# EAGLE board power_supp_basic (EAGLE 7.2.0)
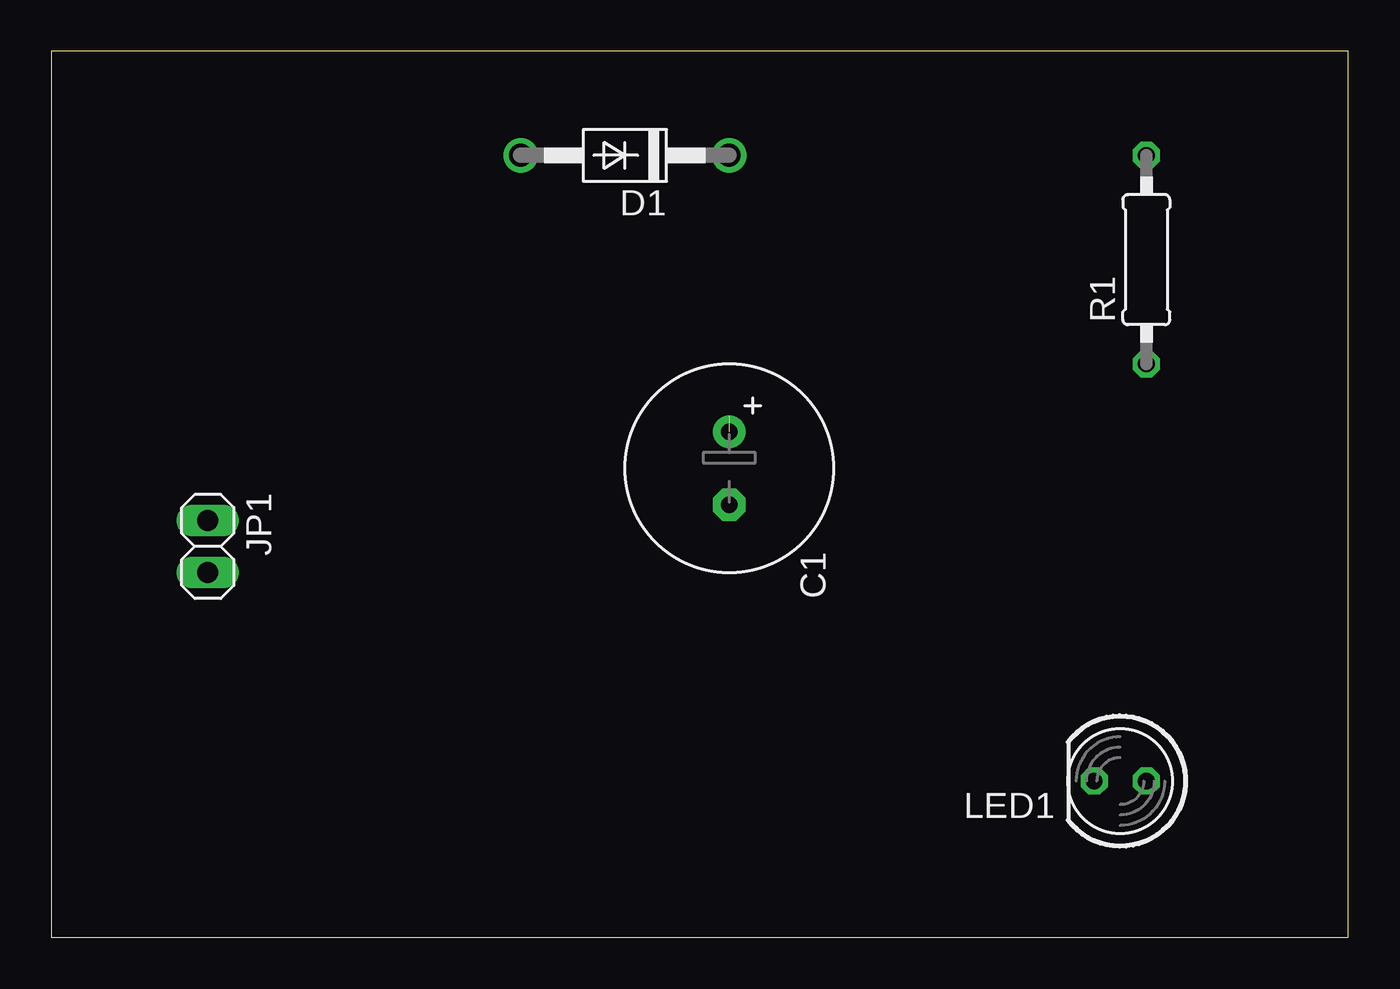
[diagram p0: board, top side]
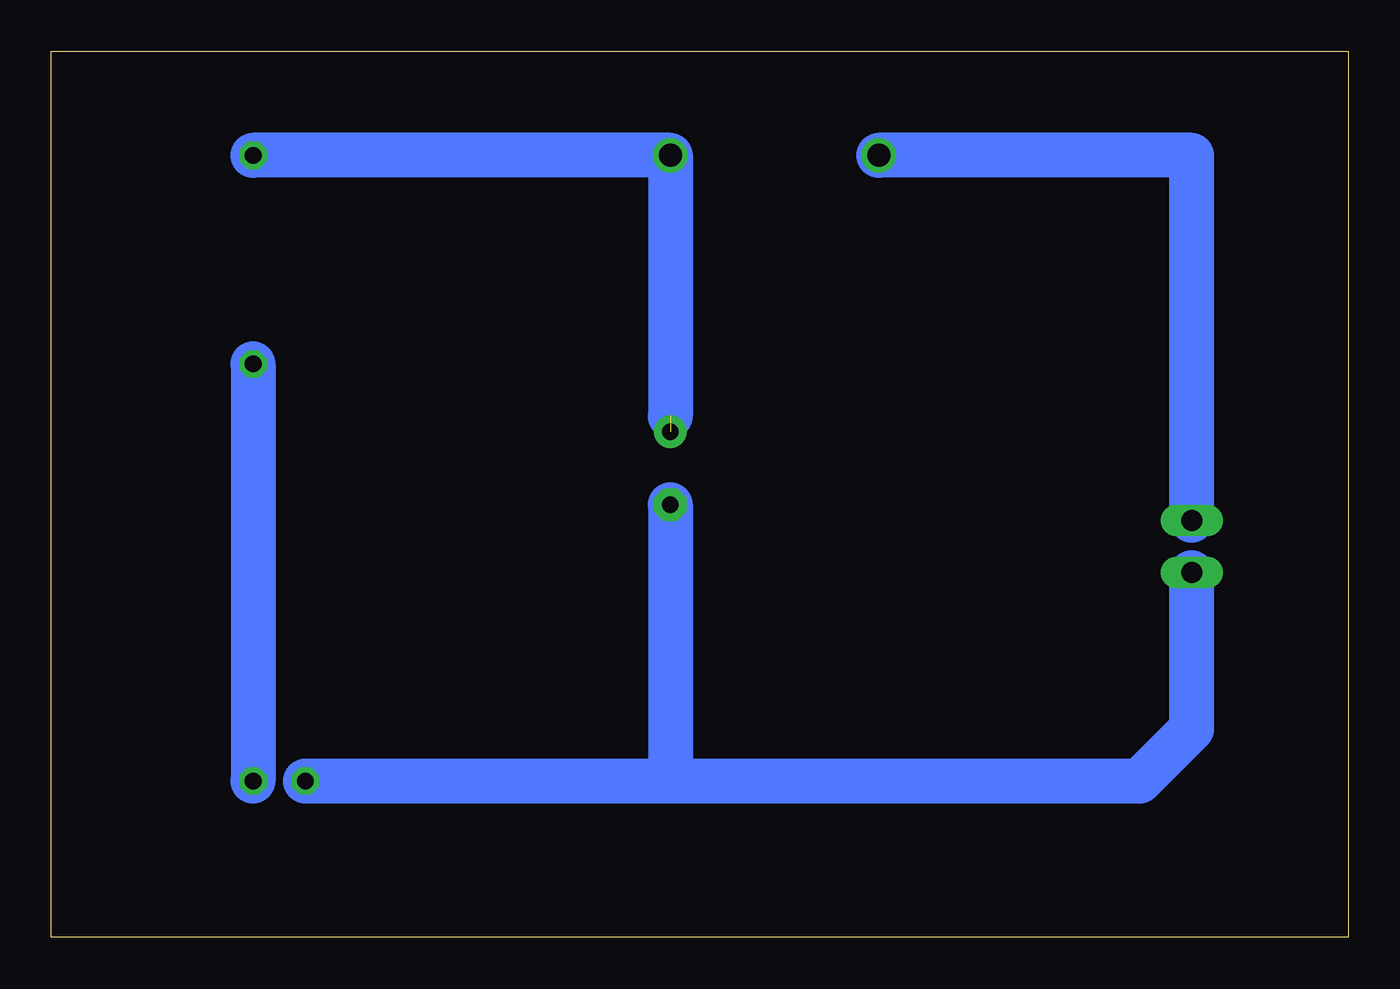
[diagram p1: board, bottom side, seen from below]

Size 63.17 x 43.17 mm. Coordinates in mm from the lower left corner, seen from the top.
Outline: 0,0 63.17,0 63.17,43.17 0,43.17 0,0
Copper layers (1*16): Top 0.035mm / dielectric 1.5mm / Bottom 0.035mm
Design rules "default": minimum track width 10mil, minimum drill 24mil, track to track 8mil, track to pad 8mil, pad to pad 8mil, via to via 8mil, smd to smd 8mil, copper to edge 40mil, drill to drill 8mil, minimum pad ring 10mil, minimum via ring 8mil, stop-mask expansion 4mil, vias tented up to drill 0mil, thermal gap 10mil

## Footprints (pad centres in the part's own frame; a part is rotated, then mirrored left to right if it is on the bottom)
E3,5-10 = drill 0.813 pad 1.6: + -1.778,0 | drill 0.813 pad 1.6 octagon: - 1.778,0
DO41-10 = drill 1.118: A 5.08,0; C -5.08,0
1X02 = drill 1.016 long: 1 -1.27,0; 2 1.27,0
LED5MM = drill 0.813 octagon: A -1.27,0; K 1.27,0
0207/10 = drill 0.813 octagon: 1 -5.08,0; 2 5.08,0

## Placement (x,y rotation side)
C1  [E3,5-10]  33.02,22.86 270 top
D1  1N4004  [DO41-10]  27.94,38.1 180 top
JP1  [1X02]  7.62,19.05 270 top
LED1  [LED5MM]  52.07,7.62 180 top
R1  [0207/10]  53.34,33.02 90 top

## Library data of the parts
C1 R1 = rcl
D1 = diode
JP1 = pinhead
LED1 = led

## Nets
N$1: D1.A JP1.1
N$2: C1.+ D1.C R1.2
N$3: LED1.A R1.1
N$5: C1.- JP1.2 LED1.K

## Tracks (layer width: path | path; a pad name or v marks a point on that pad's centre or on a via)
N$1
  Bottom 2.184: JP1.1 7.62,38.1 D1.A
N$2  (1 unrouted)
  Bottom 2.184: R1.2 D1.C 33.02,25.4
N$3
  Bottom 2.184: R1.1 LED1.A
N$5
  Bottom 2.184: LED1.K 33.02,7.62 | 33.02,7.62 10.16,7.62 7.62,10.16 JP1.2 | C1.- 33.02,7.62